# Altium PCB TC264.PcbDoc (part 1 of 2)
Units mil, origin at the board's own origin, x right, y up, seen from the top; angles counter-clockwise.
Board outline 6025.03 x 2675.03 mil, 2 copper layers (Top Layer, Bottom Layer); 160 components, 198 nets, 553 pads, 106 vias.
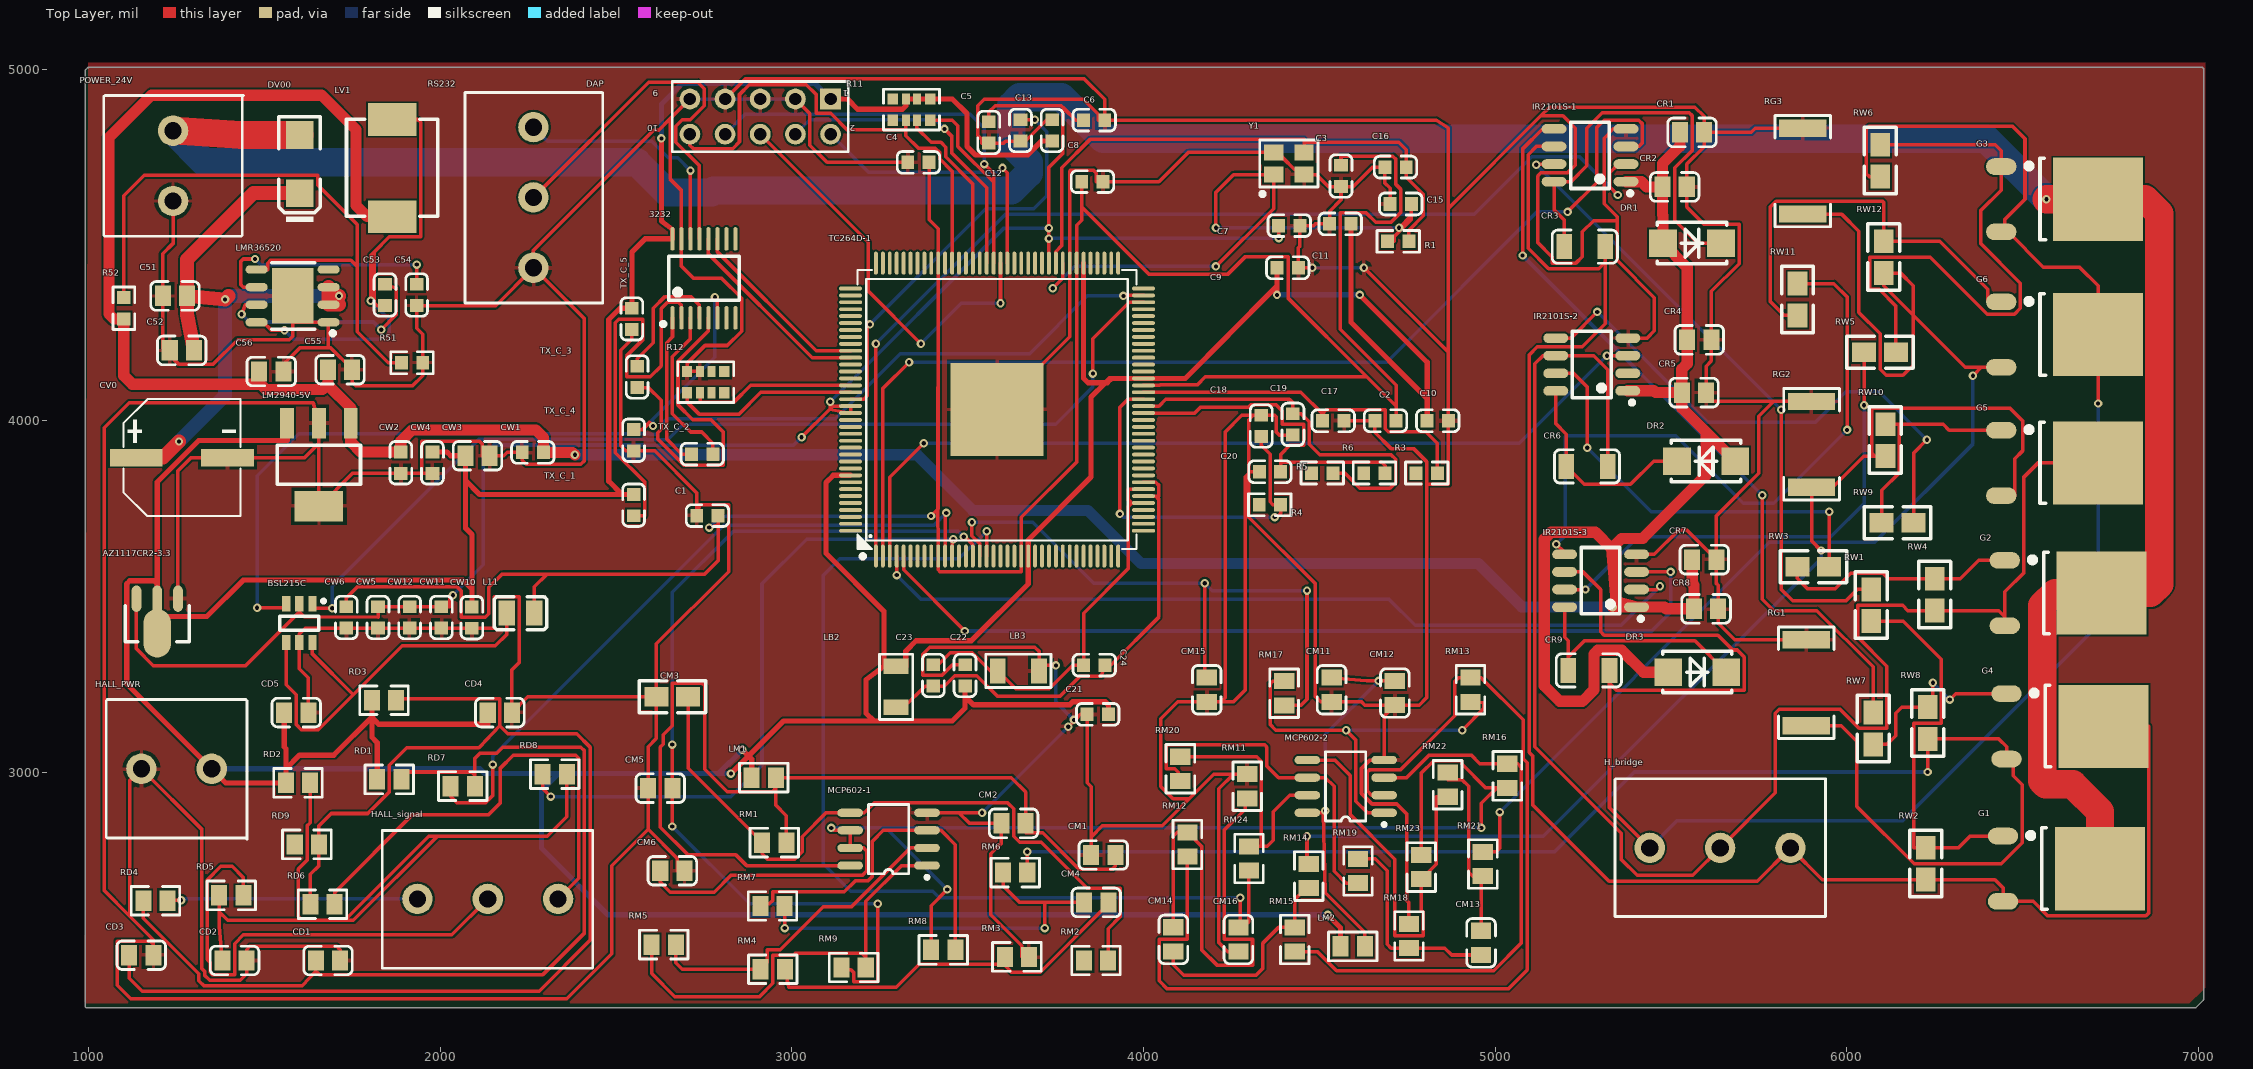
[diagram p0: Top Layer view]
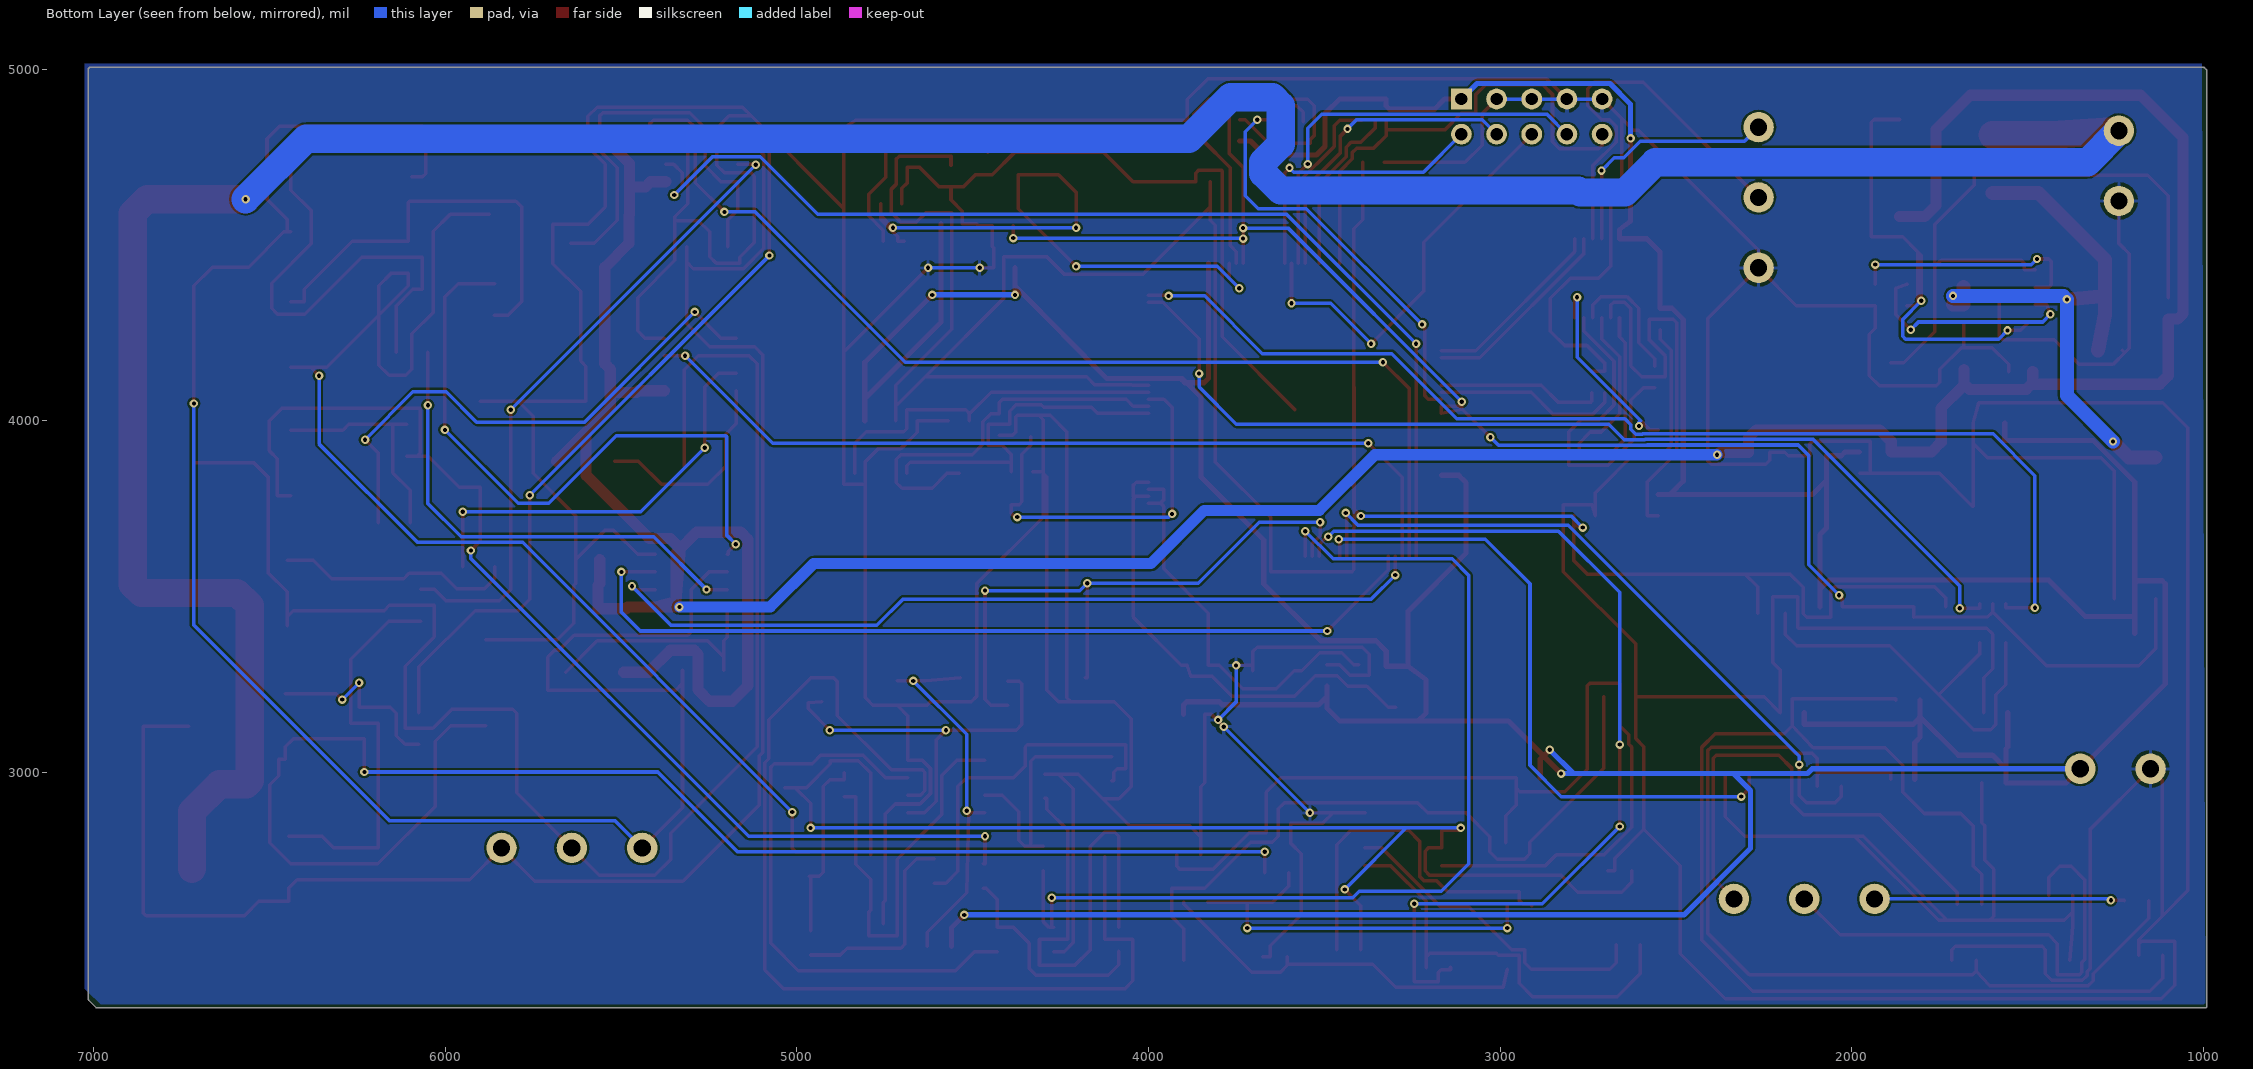
[diagram p1: Bottom Layer view, seen from below]

## Layer stack, top to bottom
Top Solder: solder mask 0.4, Solder Resist, Dk 3.5
Top Layer: signal copper 1.4
Dielectric 1: dielectric 12.6, FR-4, Dk 4.8
Bottom Layer: signal copper 1.4
Bottom Solder: solder mask 0.4, Solder Resist, Dk 3.5

## Board outline
990.65,2337.5 cw(c995,2340) 989.99,2340 989.99,4995 cw(c995,4995) 991.47,4998.56 991.45,4998.55 996.45,5003.55 996.44,5003.53 cw(c1000,5000) 1000,5005.02 7010,5005.02 cw(c7010,5000) 7015.02,5000 7015.02,2355 cw(c7010,2355) 7013.53,2351.44 7013.55,2351.45 6993.55,2331.45 6993.56,2331.47 cw(c6990,2335) 6990,2329.99 995,2329.99 cw(c995,2335)

## Design rules (kind name [scope] priority, off if disabled: settings)
Clearance [All] p1: gap=6
PolygonConnect [All] p1: connectstyle=Relief reliefconductorwidth=10 reliefentries=4 polygonreliefangle="90 Angle" airgapwidth=10
RoutingVias [All] p1: holewidth=12 width=24 viastyle="Through Hole" minholewidth=1 minwidth=12 maxholewidth=13 maxwidth=27
SilkToSilkClearance [All] p1: silktosilkclearance=5
SolderMaskExpansion [All] p1: expansion=0
Width Width_4 [(InNet('VCC 24V'))] p1: maxlimit=45 minlimit=35 preferedwidth=40
Width Width_3 [(InNet('VCC 24V IN'))] p2: maxlimit=88 minlimit=70 preferedwidth=80
Width Width_2 [(InNet('VC 7V'))] p3: maxlimit=40 minlimit=30 preferedwidth=32
Width Width_1 [(InNet('VC 5V'))] p4: maxlimit=18 minlimit=10 preferedwidth=15
Width [All] p5: maxlimit=10 minlimit=10 preferedwidth=10
29 further rules are at their usual default settings.

## Components (designator, comment, footprint, x,y, rotation, side; value= is the part's Value field where it differs from the comment)
3232 "MAX3232CSE" LC-TSSOP-16 2750,4405 r0 top
AZ1117CR2-3.3 "AZ1117CR2-3.3" LC-SOT-89(SOT-89-3) 1195,3493.94 r90 top
BSL215C "BSL215C" LC-SOT-23-6 1599.09,3424.23 r90 top
C1 "0.1u" LC-0603_C 2759.68,3730 r180 top
C2 "0.1u" LC-0603_C 4688.27,3999.96 r0 top
C3 "0.1u" LC-0603_C 4561.69,4696.18 r90 top
C4 "0.1u" LC-0603_C 3360,4735 r0 top
C5 "10u" LC-0603_C 3560,4820 r90 top
C6 "0.1u" LC-0603_C 3859.61,4854.96 r0 top
C7 "0.1u" LC-0603_C 4414.69,4555 r0 top
C8 "0.1u" LC-0603_C 3854.68,4680 r0 top
C9 "0.1u" LC-0603_C 4410,4435 r0 top
C10 "0.1u" LC-0603_C 4837.01,3999.96 r0 top
C11 "0.1u" LC-0603_C 4559.69,4560 r0 top
C12 "0.1u" LC-0603_C 3650.12,4825.63 r90 top
C13 "0.1u" LC-0603_C 3740.2,4825.63 r90 top
C15 "20p" LC-0603_C 4731.69,4616.5 r0 top
C16 "20p" LC-0603_C 4717.01,4721.5 r0 top
C17 "0.1uF" LC-0603_C 4539.53,3999.96 r0 top
C18 "0.1uF" LC-0603_C 4335,3985.32 r90 top
C19 "0.1uF" LC-0603_C 4425,3989.68 r90 top
C20 "0.1uF" LC-0603_C 4359.69,3855 r0 top
C21 "1n" LC-0603_C 3870,3165 r180 top
C22 "10u" LC-0603_C 3492.48,3275.63 r90 top
C23 "0.1u" LC-0603_C 3402.4,3275.63 r90 top
C24 "10u" LC-0603_C 3860,3305 r0 top
C51 "4.7uF" LC-0805_C 1245.55,4355 r0 top
C52 "220nF" LC-0805_C 1265,4200 r0 top
C53 "0.1uF" LC-0603_C 1842.81,4357.76 r90 top
C54 "1uF" LC-0603_C 1932.89,4357.76 r90 top
C55 "22uF" LC-0805_C 1715,4145 r0 top
C56 "22uF" LC-0805_C 1519.45,4140 r0 top
CD1 "100p" LC-0805_C 1680.55,2465 r0 top
CD2 "100p" LC-0805_C 1415,2465 r0 top
CD3 "100p" LC-0805_C 1149.45,2480 r0 top
CD4 "10u" LC-0805_C 2169.45,3170 r0 top
CD5 "0.1u" LC-0805_C 1590.55,3170 r0 top
CM1 "10u" LC-0805_C 3885.55,2765 r0 top
CM2 "Cap" LC-0805_C 3630.55,2855 r0 top
CM3 "Cap" 0805 2614.45,3215 r0 top
CM4 "Cap" LC-0805_C 3865.55,2630 r0 top
CM5 "Cap" LC-0805_C 2625.55,2955 r0 top
CM6 "Cap" LC-0805_C 2660,2720 r0 top
CM11 "10u" LC-0805_C 4535,3235 r90 top
CM12 "Cap" LC-0805_C 4715,3225.55 r90 top
CM13 "Cap" LC-0805_C 4960,2515 r90 top
CM14 "Cap" LC-0805_C 4085,2525 r90 top
CM15 "Cap" LC-0805_C 4180,3235 r90 top
CM16 "100pF" LC-0805_C 4270,2524.45 r90 top
CR1 "10u" LC-0805_C 5560,4820 r0 top
CR2 "0.1u" LC-0805_C 5510.55,4665 r0 top
CR3 "10u" LC-1206_C 5255,4495 r0 top
CR4 "10u" LC-0805_C 5580.55,4230 r0 top
CR5 "0.1u" LC-0805_C 5565.55,4080 r0 top
CR6 "10u" LC-1206_C 5261.34,3870 r0 top
CR7 "10u" LC-0805_C 5595,3605 r0 top
CR8 "0.1u" LC-0805_C 5600,3465 r0 top
CR9 "10u" LC-1206_C 5266.65,3289.8 r0 top
CV0 "Cap Pol1" CAP_SMD_8*10.2 789.49,3894.61 r0 top
CW1 "10uF" LC-0603_C 2263.31,3909.96 r0 top
CW2 "0.1u" LC-0603_C 1887.76,3880.63 r90 top
CW3 "22uF" LC-0805_C 2105.91,3900.31 r0 top
CW4 "0.1u" LC-0603_C 1977.84,3880.63 r90 top
CW5 "22uF" LC-0603_C 1822.95,3440.63 r90 top
CW6 "22uF" LC-0603_C 1732.87,3440.63 r90 top
CW10 "10uF" LC-0603_C 2090,3440 r90 top
CW11 "22uF" LC-0603_C 2003.11,3440.63 r90 top
CW12 "0.1u" LC-0603_C 1913.03,3440.63 r90 top
DAP "Header 5X2" HDR2X5 3110,4915 r180 top
DR1 "C84635" LC-SMA(DO-214AC)_S2 5560,4505 r180 top
DR2 "C84635" LC-SMA(DO-214AC)_S2 5600,3885 r0 top
DR3 "C84635" LC-SMA(DO-214AC)_S2 5575,3285 r180 top
DV00 "C35722" LC-SMA(DO-214AC)_S5 1600,4730 r90 top
G1 "BUK9222" TO-252-2 6635,2760 r180 top
G2 "BUK9222" TO-252-2 6639.96,3544.09 r180 top
G3 "BUK9222" TO-252-2 6629.96,4664.09 r180 top
G4 "BUK9222" TO-252-2 6645,3165 r180 top
G5 "BUK9222" TO-252-2 6629.96,3914.09 r180 top
G6 "BUK9222" TO-252-2 6629.96,4279.09 r180 top
H_bridge "Header 3" kf128_duanzi_3P 5840,2785 r0 top
HALL_PWR "" KF128-jiexian_2P 1250,3030 r0 top
HALL_signal "Header 3" kf128_duanzi_3P 1935,2640 r180 top
IR2101S-1 "IR2101" LC-SOIC-8_150mil 5270,4755 r90 top
IR2101S-2 "IR2101" LC-SOIC-8_150mil 5275,4160 r90 top
IR2101S-3 "IR2101" LC-SOIC-8_150mil 5300,3545 r90 top
L11 "4.7uH" L0806 2216.4,3356.76 r0 top
LB2 "C1051" LC-1206_L 3296.18,3243.35 r90 top
LB3 "C1051" LC-1206_L 3644.17,3288.82 r0 top
LM1 "10uH" LC-0805_L 2920,2985 r0 top
LM2 "10uH" LC-0805_L 4595,2505 r0 top
LM2940-5V "LM2940" LC-SOT-223 1655,3875 r90 top
LMR36520 "LMR36520FADDAR" LC-SOIC-8_EP_150mil 1580,4355 r90 top
LV1 "Inductor" SMD_0650 1865,4710 r270 top
MCP602-1 "LM258" SOP8_555_lm393 3380,2835 r90 top
MCP602-2 "LM258" SOP8_555_lm393 4680,2985 r90 top
POWER_24V "Header 2" KF128-jiexian_2P 1220,4725 r90 top
R1 "1M" LC-0603_R 4724.68,4510 r0 top
R3 "10k" LC-0603_R 4805.59,3851.22 r0 top
R4 "10k" LC-0603_R 4359.37,3761.14 r0 top
R5 "10k" LC-0603_R 4508.11,3851.22 r0 top
R6 "10k" LC-0603_R 4656.85,3851.22 r0 top
R11 "10k" LC-0603_Rx4 3340,4885 r0 top
R12 "47k" LC-0603_Rx4 2755,4110 r180 top
R51 "18k" LC-0603_R 1919.68,4165 r0 top
R52 "100k" LC-0603_R 1100,4319.68 r90 top
RD1 "10k" LC-0805_R 1855,2980 r0 top
RD2 "10k" LC-0805_R 1595.55,2970 r0 top
RD3 "10k" LC-0805_R 1840,3205 r0 top
RD4 "47R" LC-0805_R 1190,2635 r0 top
RD5 "47R" LC-0805_R 1405.55,2650 r0 top
RD6 "47R" LC-0805_R 1665,2625 r0 top
RD7 "47R" LC-0805_R 2064.02,2960.79 r0 top
RD8 "47R" LC-0805_R 2325.55,2995 r0 top
RD9 "47R" LC-0805_R 1620.55,2795 r0 top
RG1 "0.02R" LC-2512_R 5885,3255 r90 top
RG2 "0.02R" LC-2512_R 5900,3932.95 r90 top
RG3 "0.02R" LC-2512_R 5875,4710 r90 top
RM1 "Res2" LC-0805_R 2950,2800 r0 top
RM2 "Res2" LC-0805_R 3865,2465 r0 top
RM3 "Res2" LC-0805_R 3640,2475 r0 top
RM4 "Res2" LC-0805_R 2945.55,2440 r0 top
RM5 "Res2" LC-0805_R 2635.55,2510 r0 top
RM6 "Res2" LC-0805_R 3635,2715 r0 top
RM7 "Res2" LC-0805_R 2945,2620 r0 top
RM8 "Res2" LC-0805_R 3430.55,2495 r0 top
RM9 "Res2" LC-0805_R 3175.55,2445 r0 top
RM11 "Res2" LC-0805_R 4295,2960.55 r90 top
RM12 "Res2" LC-0805_R 4125,2795 r90 top
RM13 "Res2" LC-0805_R 4930,3235 r90 top
RM14 "Res2" LC-0805_R 4470,2705 r90 top
RM15 "Res2" LC-0805_R 4430,2524.45 r90 top
RM16 "Res2" LC-0805_R 5035,2990 r90 top
RM17 "Res2" LC-0805_R 4400,3225 r90 top
RM18 "Res2" LC-0805_R 4755,2534.45 r90 top
RM19 "Res2" LC-0805_R 4610,2719.45 r90 top
RM20 "Res2" LC-0805_R 4105,3010 r90 top
RM21 "Res2" LC-0805_R 4965,2739.45 r90 top
RM22 "Res2" LC-0805_R 4865,2965 r90 top
RM23 "Res2" LC-0805_R 4790,2730.55 r90 top
RM24 "Res2" LC-0805_R 4300,2755 r90 top
RS232 "Header 3" kf128_duanzi_3P 2265,4435 r270 top
RW1 "47R" 0805 6070,3430 r90 top
RW2 "10k" 0805 6225,2695 r90 top
RW3 "47R" 0805 5859.45,3585 r0 top
RW4 "10k" 0805 6250,3460 r90 top
RW5 "47R" 0805 6140,4195 r180 top
RW6 "10k" 0805 6095,4694.45 r90 top
RW7 "47R" 0805 6075,3079.45 r90 top
RW8 "10k" 0805 6230,3095 r90 top
RW9 "47R" 0805 6099.45,3710 r0 top
RW10 "10k" 0805 6110,3899.45 r90 top
RW11 "47R" 0805 5860,4299.45 r90 top
RW12 "10k" 0805 6105,4420 r90 top
TC264D-1 "TC264D" TC264D-LQFP144 3597.26,4034.52 r0 top
TX_C_1 "0.1u" LC-0603_C 2550,3760 r90 top
TX_C_2 "0.1u" LC-0603_C 2745,3905 r180 top
TX_C_3 "0.1u" LC-0603_C 2560,4124.69 r90 top
TX_C_4 "0.1u" LC-0603_C 2550,3944.68 r90 top
TX_C_5 "0.1u" LC-0603_C 2545,4289.69 r90 top
Y1 "20M" LC-SMD-3225_4P 4413.31,4731.5 r0 top

## Footprints (in the part's own frame and the unit in brackets; to place one, negate y for a bottom-side part, rotate by r counter-clockwise, add the part's x,y. Pads: shape width x height; smd on the part's side, far side on the other; paste and mask are expansions set on the pad)
0805 [mil]
  rect 68x56 smd: 1(0,0) 2(90.55,0)
  silkscreen extent -49,-45 140,45
CAP_SMD_8*10.2 [mm]
  rect 3.8x1.26 smd paste+0.051: 1(8.79,0.01) 2(15.38,0.01)
  silkscreen extent 7.86,-4.22 16.31,4.24
HDR2X5 [mm] "Connector; Header; 5x2 Position"
  rect 1.5x1.5 hole 0.9: 1(0,0)
  round 1.5 hole 0.9: 2(0,2.54) 3(2.54,0) 4(2.54,2.54) 5(5.08,0) 6(5.08,2.54) 7(7.62,0) 8(7.62,2.54) 9(10.16,0) 10(10.16,2.54)
  silkscreen extent -1.27,-1.27 11.43,3.81
KF128-jiexian_2P [mm]
  round 2.2 hole 1.25: 1(-2.54,-0.508) 2(2.54,-0.508)
  silkscreen extent -5.08,-5.59 5.08,4.49
kf128_duanzi_3P [mm]
  round 2.2 hole 1.25: 1(-10.16,0) 2(-5.08,0) 3(0,0)
  silkscreen extent -12.67,-4.95 2.54,5
L0806 [mm]
  rect 1.2x1.8 smd paste+0.051: 1(-0.705,2.438) 2(1.295,2.438)
  silkscreen extent -1.6,1.24 2.2,3.64
LC-0603_C [mm]
  rect 0.93x0.98 smd: 1(-0.77,0) 2(0.77,0)
  silkscreen extent -1.53,-0.79 1.54,0.79
LC-0603_R [mm]
  rect 0.93x0.98 smd: 1(-0.77,0) 2(0.77,0)
  silkscreen extent -1.53,-0.79 1.54,0.79
LC-0603_Rx4 [mm]
  rect 0.75x0.8 smd: 1(-1.35,-0.77) 4(1.35,-0.77) 5(1.35,0.77) 8(-1.35,0.77)
  rect 0.58x0.8 smd: 2(-0.4,-0.77) 3(0.4,-0.77) 6(0.4,0.77) 7(-0.4,0.77)
  silkscreen extent -2.02,-1.47 2.02,1.47
LC-0805_C [mm]
  rect 1.16x1.47 smd: 1(-0.875,0) 2(0.875,0)
  silkscreen extent -1.76,-1.04 1.76,1.04
LC-0805_L [mm]
  rect 1.16x1.47 smd: 1(-0.875,0) 2(0.875,0)
  silkscreen extent -1.75,-1.03 1.75,1.03
LC-0805_R [mm]
  rect 1.16x1.47 smd: 1(-0.875,0) 2(0.875,0)
  silkscreen extent -1.75,-1.03 1.75,1.03
LC-1206_C [mm]
  rect 1.13x1.8 smd: 1(-1.49,0) 2(1.49,0)
  silkscreen extent -2.36,-1.2 2.35,1.2
LC-1206_L [mm]
  rect 1.13x1.8 smd: 1(-1.49,0) 2(1.49,0)
  silkscreen extent -2.35,-1.2 2.36,1.2
LC-2512_R [mm]
  rect 1.25x3.42 smd: 1(-3.1,0) 2(3.1,0)
  silkscreen extent -4.02,-2.01 4.02,2.01
LC-SMA(DO-214AC)_S2 [mm]
  rect 2x2 smd: 1(2.1,0) 2(-2.1,0)
  silkscreen extent -2.5,-1.5 2.5,1.5
LC-SMA(DO-214AC)_S5 [mm]
  rect 2x2 smd: 1(2.1,0) 2(-2.1,0)
  silkscreen extent -4.2,-1.5 3.43,1.5
LC-SMD-3225_4P [mm]
  rect 1.4x1.15 smd: 1(-1.1,-0.8) 2(1.1,-0.8) 3(1.1,0.8) 4(-1.1,0.8)
  silkscreen extent -2.1,-2.35 2.1,1.7
LC-SOIC-8_150mil [mm]
  oval 0.7x1.8 smd: 1(-1.905,-2.6) 2(-0.635,-2.6) 3(0.635,-2.6) 4(1.905,-2.6) 5(1.905,2.6) 6(0.635,2.6) 7(-0.635,2.6) 8(-1.905,2.6)
  silkscreen extent -2.9,-3.05 2.4,1.4
LC-SOIC-8_EP_150mil [mm]
  rect 4x3 smd: 0(0,0)
  oval 0.6x1.6 smd: 1(-1.905,-2.6) 2(-0.635,-2.6) 3(0.635,-2.6) 4(1.905,-2.6) 5(1.905,2.6) 6(0.635,2.6) 7(-0.635,2.6) 8(-1.905,2.6)
  silkscreen extent -2.85,-3.05 2.4,1.5
LC-SOT-23-6 [mm]
  rect 1.1x0.6 smd: 1(1.4,-0.95) 2(1.4,0) 3(1.4,0.95) 4(-1.4,0.95) 5(-1.4,0) 6(-1.4,-0.95)
  silkscreen extent -0.5,-1.87 1.72,1.4
LC-SOT-89(SOT-89-3) [mm]
  oval 1.9x0.7 smd: 1(0,-1.5) 3(0,1.5)
  oval 3.5x2 smd: 2(-2.5,0)
  oval 2.1x0.7 smd: 2(-0.1,0)
  silkscreen extent -3.1,-2.3 -0.5,2.3
LC-SOT-223 [mm]
  rect 2.2x1 smd: 1(3,-2.3) 2(3,0) 3(3,2.3)
  rect 2.2x3.5 smd: 2(-3,0)
  silkscreen extent -1.4,-3 1.4,3
LC-TSSOP-16 [mm]
  oval 0.32x1.7 smd: 1(-2.275,-2.85) 2(-1.625,-2.85) 3(-0.975,-2.85) 4(-0.325,-2.85) 5(0.325,-2.85) 6(0.975,-2.85) 7(1.625,-2.85) 8(2.275,-2.85) 9(2.275,2.85) 10(1.625,2.85) 11(0.975,2.85) 12(0.325,2.85) 13(-0.325,2.85) 14(-0.975,2.85) 15(-1.625,2.85) 16(-2.275,2.85)
  silkscreen extent -3.1,-3.45 2.55,1.6
SMD_0650 [mm]
  rect 2.35x3.5 smd: 1(-3.727,-0.045) 2(3.289,-0.045)
  silkscreen extent -3.74,-3.35 3.26,3.25
SOP8_555_lm393 [mm]
  oval 0.6x1.85 smd: 1(-2.54,-0.108) 2(-1.27,-0.108) 3(0,-0.108) 4(1.27,-0.108) 5(1.27,5.442) 6(0,5.442) 7(-1.27,5.442) 8(-2.54,5.442)
  silkscreen extent -3.51,-0.23 1.87,4.12
TC264D-LQFP144 [mm]
  oval 0.28x1.66 smd paste+0: 1(-9.1,-10.651) 2(-8.6,-10.651) 3(-8.1,-10.651) 4(-7.6,-10.651) 5(-7.1,-10.651) 6(-6.6,-10.651) 7(-6.1,-10.651) 8(-5.6,-10.651) 9(-5.1,-10.651) 10(-4.6,-10.651) 11(-4.1,-10.651) 12(-3.6,-10.651) 13(-3.1,-10.651) 14(-2.6,-10.651) 15(-2.1,-10.651) 16(-1.6,-10.651) 17(-1.1,-10.651) 18(-0.6,-10.651) 19(-0.1,-10.651) 20(0.4,-10.651) 21(0.9,-10.651) 22(1.4,-10.651) 23(1.9,-10.651) 24(2.4,-10.651) 25(2.9,-10.651) 26(3.4,-10.651) 27(3.9,-10.651) 28(4.4,-10.651) 29(4.9,-10.651) 30(5.4,-10.651) 31(5.9,-10.651) 32(6.4,-10.651) 33(6.9,-10.651) 34(7.4,-10.651) 35(7.9,-10.651) 36(8.4,-10.651) 73(8.4,10.509) 74(7.9,10.509) 75(7.4,10.509) 76(6.9,10.509) 77(6.4,10.509) 78(5.9,10.509) 79(5.4,10.509) 80(4.9,10.509) 81(4.4,10.509) 82(3.9,10.509) 83(3.4,10.509) 84(2.9,10.509) 85(2.4,10.509) 86(1.9,10.509) 87(1.4,10.509) 88(0.9,10.509) 89(0.4,10.509) 90(-0.1,10.509) 91(-0.6,10.509) 92(-1.1,10.509) 93(-1.6,10.509) 94(-2.1,10.509) 95(-2.6,10.509) 96(-3.1,10.509) 97(-3.6,10.509) 98(-4.1,10.509) 99(-4.6,10.509) 100(-5.1,10.509) 101(-5.6,10.509) 102(-6.1,10.509) 103(-6.6,10.509) 104(-7.1,10.509) 105(-7.6,10.509) 106(-8.1,10.509) 107(-8.6,10.509) 108(-9.1,10.509)
  oval 1.66x0.28 smd paste+0: 37(10.23,-8.821) 38(10.23,-8.321) 39(10.23,-7.821) 40(10.23,-7.321) 41(10.23,-6.821) 42(10.23,-6.321) 43(10.23,-5.821) 44(10.23,-5.321) 45(10.23,-4.821) 46(10.23,-4.321) 47(10.23,-3.821) 48(10.23,-3.321) 49(10.23,-2.821) 50(10.23,-2.321) 51(10.23,-1.821) 52(10.23,-1.321) 53(10.23,-0.821) 54(10.23,-0.321) 55(10.23,0.179) 56(10.23,0.679) 57(10.23,1.179) 58(10.23,1.679) 59(10.23,2.179) 60(10.23,2.679) 61(10.23,3.179) 62(10.23,3.679) 63(10.23,4.179) 64(10.23,4.679) 65(10.23,5.179) 66(10.23,5.679) 67(10.23,6.179) 68(10.23,6.679) 69(10.23,7.179) 70(10.23,7.679) 71(10.23,8.179) 72(10.23,8.679) 109(-10.93,8.679) 110(-10.93,8.179) 111(-10.93,7.679) 112(-10.93,7.179) 113(-10.93,6.679) 114(-10.93,6.179) 115(-10.93,5.679) 116(-10.93,5.179) 117(-10.93,4.679) 118(-10.93,4.179) 119(-10.93,3.679) 120(-10.93,3.179) 121(-10.93,2.679) 122(-10.93,2.179) 123(-10.93,1.679) 124(-10.93,1.179) 125(-10.93,0.679) 126(-10.93,0.179) 127(-10.93,-0.321) 128(-10.93,-0.821) 129(-10.93,-1.321) 130(-10.93,-1.821) 131(-10.93,-2.321) 132(-10.93,-2.821) 133(-10.93,-3.321) 134(-10.93,-3.821) 135(-10.93,-4.321) 136(-10.93,-4.821) 137(-10.93,-5.321) 138(-10.93,-5.821) 139(-10.93,-6.321) 140(-10.93,-6.821) 141(-10.93,-7.321) 142(-10.93,-7.821) 143(-10.93,-8.321) 144(-10.93,-8.821)
  rect 6.7x6.7 smd paste+0: 145(-0.35,-0.071)
  silkscreen extent -10.43,-10.82 9.73,10.01
TO-252-2 [mm]
  oval 2.2x1.2 smd: 1(4.84,-1.495) 3(4.836,3.227)
  rect 6.5x6 smd: 2(-2.16,0.866)
  silkscreen extent 1.64,-2.08 3.04,3.79

## Part data
3232: "3.0V TO 5.5V, Low-Power, up to 1Mbps, True RS-232 Transceiver Using Four 0.1µF External Capacitor"
AZ1117CR2-3.3: library part AZ1117CR2-3.3TRG1
C1 C2 C3 C4 C5 C6 C7 C8 C9 C10 C11 C12 C13 C15 C16 C17 C18 C19 C20 C21 C22 C23 C51 C52 C53 C54 C55 C56 CD1 CD2 CD3 CD4 CD5 CM1 CM11 CM16 CR1 CR2 CR3 CR4 CR5 CR6 CR7 CR8 CR9 CW1 CW2 CW4 CW5 CW6 CW10 CW11 CW12 TX_C_1 TX_C_2 TX_C_3 TX_C_4 TX_C_5: library part Cap, "Capacitor"
C24 CW3: library part "Cap Pol1", "Polarized Capacitor (Radial)"
CM2 CM3 CM4 CM5 CM6 CM12 CM13 CM14 CM15: "Capacitor"
CV0: "Polarized Capacitor (Radial)"
DAP: "Header, 5-Pin, Dual row"
DR1 DR2 DR3 DV00: library part Diode, "Default Diode"
G1 G2 G3 G4 G5 G6: library part MOSFET_N
H_bridge HALL_signal RS232: "Header, 3-Pin"
HALL_PWR: library part "Header 2", "Header, 2-Pin"
L11 LB2 LB3 LM1 LM2 R1 R3 R4 R5 R6 R51 R52: library part Res2, "Resistor"
LM2940-5V: library part L7805ABD2T, "Precision 1A Regulator"
POWER_24V: "Header, 2-Pin"
R11 R12: library part RES_RANGE_4
RD1 RD2 RD3 RD4 RD5 RD6 RD7 RD8 RD9 RG1 RG2 RG3 RW1 RW2 RW3 RW4 RW5 RW6 RW7 RW8 RW9 RW10 RW11 RW12: library part RES_COMMOM
RM1 RM2 RM3 RM4 RM5 RM6 RM7 RM8 RM9 RM11 RM12 RM13 RM14 RM15 RM16 RM17 RM18 RM19 RM20 RM21 RM22 RM23 RM24: "Resistor"
Y1: library part XTL-YXL

## Via types
v1: diameter 24, hole 12, Top Layer to Bottom Layer, 106 vias

## Nets (pads, with @x,y where several pads share a name; then routed paths per layer and width w, separated by ;. In a path a pad name is that pad's centre, name@x,y a point inside that pad or via, vN(x,y) a via of type N, cw(c..) or ccw(c..) an arc to the next point about the centre after c; other vN are vias at no path point)
AD0: R3.1
AD1: R4.1
AD2: R5.1
AD3: R6.1
AN0: C17.1 R3.2 TC264D-1.57 | length 1041.1
  Top Layer w10: TC264D-1.57@4000,4080.94 4447.06,4080.94 4509.21,4020.21 ; C17.1@4509.21,3999.96 4509.21,4018.79 4509.21,4020.21 ; R3.2@4835.91,3851.22 4835.91,3936 4802.91,3969 4696,3969 4688,3977 4688,4031 4520,4031 4509.21,4020.21
AN1: C18.1 R4.2 TC264D-1.56 | length 1098.7
  Top Layer w10: v1(3933,3735) 3933,4038.26 3956,4061.26 TC264D-1.56@4000,4061.26 ; C18.1@4335,3955 4335,3930 4360,3905 4360,3769.14 4368,3761.14 R4.2@4389.69,3761.14 4389.69,3736 4379.69,3726 v1(4373,3726)
  Bottom Layer w10: v1(3933,3735) 3942,3726 v1(4373,3726)
AN2: C19.2 R5.2 TC264D-1.55 | length 1120.6
  Top Layer w10: TC264D-1.55@4000,4041.57 4044,4041.57 4063.37,4060.94 4415.06,4060.94 4425,4051 C19.2@4425,4020 4448,4020 4471.29,3996.71 4471.29,3932.71 4501,3903 4704,3903 4717,3890 4717,3824 4701,3808 4615.22,3808 4572,3851.22 R5.2@4538.43,3851.22
AN3: C20.2 R6.2 TC264D-1.54 | length 1016.6
  Top Layer w10: TC264D-1.54@4000,4021.89 4145.89,4021.89 4162,4038 4298.06,4038 4305,4044.94 4377.06,4044.94 4394.71,4027.29 4394.71,3990 4455.29,3990 4455.29,3930 4416,3930 4390,3904 4390,3882 ; C20.2@4390,3855 4390,3882 ; R6.2@4687.17,3851.22 4687.17,3872 4677.17,3882 4390,3882
AN4: TC264D-1.53
AN5: TC264D-1.52
AN6: TC264D-1.51
AN7: TC264D-1.50
AN8: TC264D-1.49
AN10: TC264D-1.48
AN11: TC264D-1.47
AN12: TC264D-1.46
AN13: TC264D-1.45
AN16: TC264D-1.40
AN17: TC264D-1.39
AN20: TC264D-1.38
AN21: TC264D-1.37
AN24: TC264D-1.36
AN25: TC264D-1.35
AN35: TC264D-1.34
AN36: TC264D-1.33
AN37: TC264D-1.32
AN38: TC264D-1.31
AN39: TC264D-1.30
AN44: TC264D-1.29
AN45: TC264D-1.28
AN46: TC264D-1.27
AN47: TC264D-1.26
AN48: TC264D-1.25
AN49: TC264D-1.24
G_H1: IR2101S-1.7 RW1.2 | length 1830.9
  Top Layer w10: v1(5117,4728) 5119,4730 IR2101S-1.7@5167.64,4730 ; v1(5814,4031) 5814,3520 5846,3488 5998,3488 6030.55,3520.55 RW1.2@6070,3520.55
  Bottom Layer w10: v1(5117,4728) v1(5814,4031)
G_H2: IR2101S-2.7 RW3.2 | length 1197.9
  Top Layer w10: IR2101S-2.7@5172.64,4135 5223,4135 5262,4096 v1(5262,3923) ; RW3.2@5950,3585 v1(5950,3741)
  Bottom Layer w10: v1(5262,3923) 5444,3741 v1(5950,3741)
G_H3: IR2101S-3.7 RW5.2 | length 1383.6
  Top Layer w10: IR2101S-3.7@5197.64,3520 v1(5257,3520) ; v1(6049.45,4044) RW5.2@6049.45,4195
  Bottom Layer w10: v1(5257,3520) 5407,3670 5955,3670 6049.45,3764.45 v1(6049.45,4044)
G_L1: IR2101S-1.5 RW7.2 | length 2201.3
  Top Layer w10: v1(5078,4470) 5078,4773 5135,4830 IR2101S-1.5@5167.64,4830 ; v1(5760,3788) 5760,3492 5792,3460 5915,3460 6075,3300 RW7.2@6075,3170
  Bottom Layer w10: v1(5078,4470) v1(5760,3788)
G_L2: IR2101S-2.5 RW9.2 | length 1559.8
  Top Layer w10: IR2101S-2.5@5172.64,4235 5216,4235 v1(5290.5,4309.5) ; RW9.2@6190,3710 6190,3908 v1(6228,3946)
  Bottom Layer w10: v1(5290.5,4309.5) 5604,3996 5911,3996 5997,4082 6092,4082 v1(6228,3946)
G_L3: IR2101S-3.5 RW11.2 | length 1859.8
  Top Layer w10: v1(5174,3649) 5195,3628 5195,3620 IR2101S-3.5@5197.64,3620 ; RW11.2@5860,4390 5963,4390 6001,4352 v1(6001,3974)
  Bottom Layer w10: v1(5174,3649) 5200,3675 5200,3955 5202,3957 5514,3957 5706,3765 5792,3765 v1(6001,3974)
GH1+: G4.3 RG1.1 RM6.2 RW8.1 | length 4253.6
  Top Layer w10: RM6.2@3669.45,2715 v1(3669.45,2774) ; RG1.1@5885,3132.95 5984,3132.95 6029,3087.95 6029,2903 6192,2740 6439,2740 6499,2800 6499,2965 6474,2990 6474,3037.94 G4.3@6454.61,3037.94 6454.61,3072.39 6432,3095 RW8.1@6230,3095 v1(6230,3001)
  Bottom Layer w10: v1(3669.45,2774) 5169,2774 5396,3001 v1(6230,3001)
GH1-: 3232.15 AZ1117CR2-3.3.1 BSL215C.5 C1.2 C2.1 C3.1 C4.1 C5.1 C6.2 C7.2 C8.2 C9.2 C10.2 C11.1 C12.1 C13.2 C15.1 C16.1 C17.2 C18.2 C19.1 C20.1 C21.2 C22.2 C51.1 C52.1 C54.1 C55.2 C56.2 CD1.2 CD2.2 CD3.2 CD4.2 CD5.2 CM1.1 CM2.1 CM3.1 CM5.1 CM6.2 CM11.1 CM12.1 CM15.1 CM16.1 CR1.2 CR2.2 CR4.2 CR5.2 CR7.2 CR8.2 CV0.2 CW1.1 CW2.1 CW3.2 CW4.1 CW5.1 CW6.1 CW10.1 CW11.1 CW12.1 DAP.3 DAP.5 DAP.7 DAP.9 HALL_PWR.1 IR2101S-1.4 IR2101S-2.4 IR2101S-3.4 LB3.2 LM2940-5V.2 LMR36520.0 LMR36520.1 MCP602-1.4 MCP602-2.4 POWER_24V.1 R12.3 R12.4 R51.2 RG1.2 RG2.2 RG3.2 RM3.2 RM11.2 RM18.2 RS232.3 TC264D-1.80 TC264D-1.145 TX_C_4.1 TX_C_5.1 Y1.2 Y1.4 | length 38439.3
  Top Layer w10: C52.1@1230.55,4200 C52.1@1223.78,4193.22 ; POWER_24V.1@1240,4625 1240,4503.9 1211.1,4475 C51.1@1211.1,4355 1211.1,4286.45 1211.1,4205.9 C52.1@1223.78,4193.22 ; AZ1117CR2-3.3.1@1254.06,3493.94 1254.06,3858.06 1291,3895 CV0.2@1395,3895 1614,3895 1655,3936 ; C56.2@1553.9,4140 1553.9,4160.9 1600,4207 1682,4207 ; LMR36520.0@1580,4355 LMR36520.0@1580,4280 ; CD5.2@1625,3170 1625,3269 1599.09,3294.91 BSL215C.5@1599.09,3369.11 1599.09,3393.41 1616,3410.31 CW6.1@1732.87,3410.31 CW5.1@1822.95,3410.31 CW12.1@1913.03,3410.31 CW11.1@2003.11,3410.31 2046,3410.31 2046.63,3409.69 CW10.1@2090,3409.69 2151.64,3409.69 2154.04,3412.09 2154.04,3499.19 2224,3499.19 2224,3312 2203.9,3291.9 CD4.2@2203.9,3170 2248.9,3215 CM3.1@2614.45,3215 ; LMR36520.1@1682.36,4280 LMR36520.1@1682,4280 ; CD1.2@1715,2465 1715,2496 1706,2505 1458.45,2505 1449.45,2496 CD2.2@1449.45,2465 1449.45,2427.45 1431,2409 1344,2409 1329.61,2423.39 1329.61,2434.59 1321,2443.2 1321,2839 HALL_PWR.1@1150,3010 1117,2977 1117,2590.9 ; CW4.1@1977.84,3850.31 1947,3850.31 ; TX_C_5.1@2545,4259.37 2545,4231.6 2513.71,4200.31 2513.71,3928.47 2527.81,3914.37 TX_C_4.1@2550,3914.37 2609.63,3914.37 2729.37,3794.63 C1.2@2729.37,3730 2738.37,3761 2820,3761 2820,3571 2614.45,3365.45 CM3.1@2614.45,3215 ; CM6.2@2694.45,2720 2674,2720 2674,2755.1 2591.1,2838 ; DAP.9@2710,4915 2653.47,4858.47 ; R12.3@2739.25,4140.31 R12.4@2701.85,4140.31 2701.85,4162.85 2753,4214 2816,4214 2857,4255 2857,4348 2800,4405 2720,4405 2686.02,4438.98 3232.15@2686.02,4517.2 2686.02,4655 2653.47,4687.55 2653.47,4858.47 ; DAP.7@2810,4915 2868,4973 3830.92,4973 3889.92,4914 C6.2@3889.92,4854.96 ; DAP.3@3010,4915 3051.25,4873.75 3051.25,4783.75 3100,4735 C4.1@3329.69,4735 ; MCP602-1.4@3384.25,2885 3475,2885 ; C22.2@3492.48,3305.94 3456.94,3305.94 3427,3276 3372.11,3276 3372.11,3336 3392.11,3356 3691,3356 3702.84,3344.16 LB3.2@3702.84,3304 ; 3539.31,4789.69 3539.44,4789.69 ; v1(3541,2885) 3475,2885 ; TC264D-1.145@3583.47,4031.73 3790.16,4238.42 TC264D-1.80@3790.16,4448.26 3790.16,4710.16 3793,4713 3857,4713 3866,4704 3866,4680 C8.2@3885,4680 4044.01,4680 4127,4762.99 Y1.4@4370,4762.99 4381,4762.99 4443.99,4700 Y1.2@4456.61,4700 4492,4700 4526.13,4665.87 C3.1@4561.69,4665.87 ; RM3.2@3674.45,2475 3654,2475 3654,2507 3566,2595 3566,2768.9 3596.1,2799 CM2.1@3596.1,2855 3505,2855 3475,2885 ; LB3.2@3702.84,3288.82 LB3.2@3702.84,3304 ; C13.2@3740.2,4855.94 3724.63,4855.94 3664,4795.31 C12.1@3650.12,4795.31 3607.63,4795.31 3602,4789.69 C5.1@3560,4789.69 3539.44,4789.69 ; v1(3751,3304) LB3.2@3702.84,3304 ; v1(3786,3130) v1@3805,3149 ; v1(3802,3149) v1@3805,3149 ; CM1.1@3851.1,2765 3851.1,2816 ; CM16.1@4270,2490 4240,2490 4214.06,2515.94 4214.06,2953.06 4256,2995 ; C20.1@4329.37,3855 4304,3855 4299,3850 ; C19.1@4425,3959.37 4386.56,3959.37 4377.93,3967.99 4377.93,4011.32 4373.63,4015.63 C18.2@4335,4015.63 4312,4015.63 ; v1(4480,4435) C9.2@4440.32,4435 4440.32,4492 4445,4496.68 C7.2@4445,4555 4484,4555 4489,4560 C11.1@4529.37,4560 4529.37,4596 4561.69,4628.32 C3.1@4561.69,4665.87 ; C17.2@4569.84,3999.96 C2.1@4657.95,3999.96 4657.95,3967.05 4704,3921 4768,3921 4805,3884 4805,3820 ; v1(4627,4435) 4867.32,4194.68 ; C15.1@4701.38,4616.5 4701.38,4661 4686.69,4675.69 C16.1@4686.69,4721.5 4651.63,4721.5 4596,4665.87 C3.1@4561.69,4665.87 ; RM18.2@4755,2568.9 4755,2629 4748,2636 4748,2882 4720,2910 4650,2910 4620,2940 4620,3011 4644,3035 MCP602-2.4@4684.25,3035 4684.25,3160.35 CM12.1@4715,3191.1 ; IR2101S-1.4@5372.36,4830 5336,4830 5309.93,4803.93 5309.93,4617.07 5347,4580 5347,4569 ; IR2101S-2.4@5377.36,4235 5432,4235 5453,4256 5453,4350 5347,4456 5347,4569 ; IR2101S-3.4@5402.36,3620 5453,3620 5521,3688 5546.45,3688 CR7.2@5629.45,3605 ; RG3.2@5875,4832.05 5740.05,4832.05 5728,4820 CR1.2@5594.45,4820 ; RG1.2@5885,3377.05 5681.4,3377.05 5634.45,3424 CR8.2@5634.45,3465 5634.45,3532 5629.45,3537 CR7.2@5629.45,3605 ; RG2.2@5900,4055 5792,4055 ; 1117,2590.9 1183.9,2524 ; 1117,2590.9 1044,2663.9 1044,3980 1115,4051 1639,4051 LM2940-5V.2@1655,3993.11 1655,3936 ; 1183.9,2512 1175.9,2520 1081,2520 1081,2395 1120,2356 2360,2356 2488,2484 2488,2734.9 2591.1,2838 ; 1183.9,2512 CD3.2@1183.9,2480 1183.9,2524 ; 1183.9,2512 1183.9,2524 ; C52.1@1223.78,4193.22 1257,4160 1353,4160 1423.55,4230.55 1570.55,4230.55 1580,4240 LMR36520.0@1580,4280 ; LMR36520.0@1580,4280 LMR36520.1@1682,4280 ; 1655,3936 LM2940-5V.2@1655,3756.89 1656.78,3756.89 1750.2,3850.31 CW2.1@1887.76,3850.31 1947,3850.31 ; 1682,4207 LMR36520.1@1682,4280 ; 1682,4207 1688.55,4207 1749.45,4146.1 C55.2@1749.45,4145 1749.45,4109.55 1760,4099 1921,4099 1950,4128 R51.2@1950,4165 1950,4246 1932.89,4263.11 C54.1@1932.89,4327.44 2157.44,4327.44 RS232.3@2265,4435 ; 1947,3850.31 1947,3941 2112,3941 2120,3933 2120,3900.31 CW3.2@2140.35,3900.31 2181,3900.31 2190.65,3909.96 CW1.1@2232.99,3909.96 2232.99,3888 2244.99,3876 2400,3876 2410,3886 2410,4290 RS232.3@2265,4435 ; RS232.3@2265,4435 2265,4484.47 2606.53,4826 2621,4826 2653.47,4858.47 ; 2591.1,2838 CM5.1@2591.1,2955 2591.1,3073 2614.45,3096.35 CM3.1@2614.45,3215 ; 3539.44,4789.69 3539.44,4800.81 3529,4811.24 3529,4896 3547,4914 3829,4914 3871,4872 3871,4854.96 C6.2@3889.92,4854.96 ; v1@3805,3149 3821,3165 C21.2@3839.69,3165 3839.69,2970.42 3851.1,2959 3851.1,2816 ; 3851.1,2816 3883.1,2848 4053,2848 4130,2925 ; C6.2@3889.92,4854.96 4832,4854.96 4867.32,4832 4867.32,4604.53 ; 4130,2925 4200,2995 ; 4130,2925 4084,2925 4049.06,2959.94 4049.06,3152.06 4097.55,3200.55 CM15.1@4180,3200.55 4220,3200.55 ; 4200,2995 RM11.2@4295,2995 4256,2995 ; 4200,2995 4256,2995 ; 4220,3200.55 4232,3212.55 4232,3968 4279.63,4015.63 4312,4015.63 ; 4220,3200.55 4256,3200.55 4290,3234.55 4290,3841 4299,3850 ; 4299,3850 4299,4002.63 4312,4015.63 ; 4299,3850 4299,3726 4489,3536 4489,3215.55 4504,3200.55 CM11.1@4535,3200.55 4620,3200.55 4629.45,3191.1 CM12.1@4715,3191.1 ; CM12.1@4715,3191.1 4784,3191.1 4805,3212.1 4805,3820 ; 4805,3820 4867.32,3820 C10.2@4867.32,3999.96 ; C10.2@4867.32,3999.96 4867.32,4194.68 ; C10.2@4867.32,3999.96 4867.32,4604.53 ; 4867.32,4194.68 4867.32,4604.53 ; 4867.32,4604.53 5129.8,4867 ; 5129.8,4867 5193,4867 5228,4832 5228,4727 5206,4705 5130.2,4705 5121.2,4696 5121.2,4506.8 5163,4465 5163,4448.57 5230,4448.57 5248,4466.57 5248,4537 5280,4569 5347,4569 ; 5129.8,4867 5154.8,4892 5568,4892 5594.45,4865.55 CR1.2@5594.45,4820 ; CR1.2@5594.45,4820 5594.45,4779.45 5545,4730 CR2.2@5545,4665 5545,4608 5594,4559 5694,4559 5694,4447 5615,4368 CR4.2@5615,4230 5615,4170 5600,4155 CR5.2@5600,4080 5600,4055 5792,4055 ; CR7.2@5629.45,3605 5629.45,3730 5750,3850.55 5750,4013 5792,4055
  Bottom Layer w10: DAP.9@2710,4915 DAP.7@2810,4915 DAP.5@2910,4915 DAP.3@3010,4915 ; v1(3541,2885) v1(3786,3130) ; v1(3751,3304) 3751,3200 v1(3802,3149) ; v1(4480,4435) v1(4627,4435)
GH2+: G5.3 RG2.1 RM14.2 RW10.1 | length 3176.8
  Top Layer w10: v1(4465,2818) 4465,2739.45 RM14.2@4470,2739.45 ; v1(5927,3631) 5900,3658 RG2.1@5900,3810.91 5960,3810.91 6048.54,3899.45 6080,3899.45 ; RW10.1@6110,3899.45 6080,3899.45 ; G5.3@6439.57,3787.04 6478,3787.04 6478,3892 6500,3914 6500,4000 6465,4035 6071,4035 6071,3908.45 6080,3899.45
  Bottom Layer w10: v1(4465,2818) 5137,2818 5927,3608 v1(5927,3631)
GH3+: G6.3 RG3.1 RM21.2 RW12.1 | length 3665
  Top Layer w10: RM21.2@4965,2773.9 5002.9,2773.9 5013,2784 v1(5013,2887) ; RG3.1@5875,4587.95 5985.05,4587.95 6034,4539 6034,4308 6095,4247 6095,4146 6112,4129 6160,4129 6189,4158 6189,4300 ; v1(6359,4128) 6383.04,4152.04 ; G6.3@6439.57,4152.04 6383.04,4152.04 ; 6189,4300 6105,4384 RW12.1@6105,4420 6153,4420 6189,4384 6189,4300 ; 6189,4300 6336.96,4152.04 6383.04,4152.04
  Bottom Layer w10: v1(5013,2887) 5780,3654 6079,3654 6359,3934 v1(6359,4128)
HB1: CR3.2 G1.3 G4.2 H_bridge.3 IR2101S-1.6 RW2.1 | length 5005.2
  Top Layer w10: IR2101S-1.6@5167.64,4780 5117.2,4780 5094,4756.8 5094,4490.57 5152,4432.57 5294.57,4432.57 5313.66,4451.66 ; CR3.2@5313.66,4495 5313.66,4451.66 ; G4.2@6730.04,3130.91 6859,3130.91 6859,2600 6851,2592 6570.94,2592 6530,2632.94 G1.3@6444.61,2632.94 6444.61,2672 6421.61,2695 RW2.1@6225,2695 5930,2695 H_bridge.3@5840,2785 5745,2690 5324,2690 5107,2907 5107,3046.53 5097,3056.53 5097,4187 5120,4210 5248,4210 5313.66,4275.66 5313.66,4451.66
HB2: CR6.2 G2.3 G5.2 H_bridge.2 IR2101S-2.6 RW4.1 | length 4633.4
  Top Layer w10: CR6.2@5320,3870 5320,4145 5280,4185 IR2101S-2.6@5172.64,4185 5136,4185 5113,4162 5113,3072.53 5359,2826.53 5359,2752 5404,2707 5562,2707 H_bridge.2@5640,2785 5797,2942 5797,3168 5808,3179 5981,3179 6035,3125 6114,3125 6114,3302 6031,3385 6031,3475 6159,3475 6174,3460 RW4.1@6250,3460 6432,3460 6449.57,3442.43 ; G2.3@6449.57,3417.04 6449.57,3442.43 ; G5.2@6715,3880 6544,3880 6504,3840 6504,3568 6449.57,3513.57 6449.57,3442.43
HB3: CR9.2 G3.3 G6.2 H_bridge.1 IR2101S-3.6 RW6.1 | length 5487.3
  Top Layer w10: IR2101S-3.6@5197.64,3570 5250,3570 5300,3520 5300,3400 5309.77,3390.23 5633.77,3390.23 5676,3348 5689,3348 5709,3328 5709,3234 5344,3234 5325.32,3252.68 ; CR9.2@5325.32,3289.8 5325.32,3252.68 ; H_bridge.1@5440,2785 5325.32,2899.68 5325.32,3252.68 ; RW6.1@6095,4694.45 6064,4694.45 6056,4702.45 6056,4829 6064,4837 6472,4837 6507,4802 6507,4630 6450,4573 G3.3@6450,4537.04 ; G3.3@6439.57,4537.04 G3.3@6450,4537.04 ; v1(6715,4049) G6.2@6715,4245 6715,4384 6662,4437 6559.04,4437 6459,4537.04 G3.3@6450,4537.04
  Bottom Layer w10: H_bridge.1@5440,2785 5518,2863 6159,2863 6715,3419 v1(6715,4049)
Net3232_1: 3232.1 TX_C_2.2 | length 440
  Top Layer w10: 3232.1@2660.43,4292.8 2660.43,4238.42 2644.09,4222.07 2644.09,3948.05 2687.13,3905 TX_C_2.2@2714.69,3905
Net3232_2: 3232.2 TX_C_1.1 | length 1258.2
  Top Layer w10: TX_C_1.1@2550,3729.69 2581,3729.69 2581,3826 2497.71,3909.29 2497.71,4278.71 2508,4289 2575.29,4289 2575.29,4229.58 2529.71,4184 2529.71,4125 2597.27,4125 2628.09,4155.81 2628.09,4319.09 2646.26,4337.26 2676.76,4337.26 2686.02,4328 3232.2@2686.02,4292.8
Net3232_3: 3232.3 TX_C_2.1 | length 475.2
  Top Layer w10: 3232.3@2711.61,4292.8 2711.61,4233.61 2660.09,4182.08 2660.09,4019.91 2712,3968 2743.32,3968 2775.32,3936 TX_C_2.1@2775.32,3905
Net3232_4: 3232.4 TX_C_3.2 | length 375.2
  Top Layer w10: TX_C_3.2@2560,4155 2560,4176 2606,4222 2606,4320 2639.26,4353.26 2712.74,4353.26 2737.2,4328.8 3232.4@2737.2,4292.8
Net3232_5: 3232.5 TX_C_3.1 | length 953.6
  Top Layer w10: TX_C_3.1@2560,4094.37 2592,4094.37 2628,4058.37 2628,3975.47 2618,3965.47 2618,3948 2692,3874 2805,3874 2805,3968 2770,4003 2718,4003 2676.09,4044.91 2676.09,4169.09 2762.8,4255.8 3232.5@2762.8,4292.8
Net3232_6: 3232.6 TX_C_4.2 | length 571.7
  Top Layer w10: TX_C_4.2@2550,3975 2575,3975 2595,3995 v1(2605,3985) ; v1(2781,4351) 2788.39,4343.61 3232.6@2788.39,4292.8
  Bottom Layer w10: v1(2605,3985) 2605,3995 2600,4000 2781,4181 v1(2781,4351)
NetBSL215C_4: BSL215C.4 BSL215C.6 L11.1 | length 1219.1
  Top Layer w10: BSL215C.4@1561.69,3369.11 1561.69,3249.31 1590,3221 1590,3136 1604.69,3121.31 1653.31,3121.31 1752.5,3220.5 ; BSL215C.6@1636.5,3369.11 1636.5,3336.5 1752.5,3220.5 ; L11.1@2188.66,3452.76 2188.66,3392 2156.66,3360 1892,3360 1752.5,3220.5
NetC12_2: C12.2 TC264D-1.125 | length 1182.9
  Top Layer w10: TC264D-1.125@3166.94,4061.26 3204.26,4061.26 3215,4072 3215,4267 v1(3222,4274) ; C12.2@3650.12,4855.94 v1(3691,4855.94)
  Bottom Layer w10: v1(3222,4274) 3551.37,4603.37 3688.36,4603.37 3724.99,4640 3724.99,4821.96 v1(3691,4855.94)